# Altium PCB PCB.PcbDoc (part 1 of 2)
Units mm, origin at the board's own origin, x right, y up, seen from the top; angles counter-clockwise.
Board outline 135 x 105 mm, 2 copper layers (Top Layer, Bottom Layer); 93 components, 49 nets, 259 pads, 11 vias.
Unrouted connection lines stored in the file: 35.
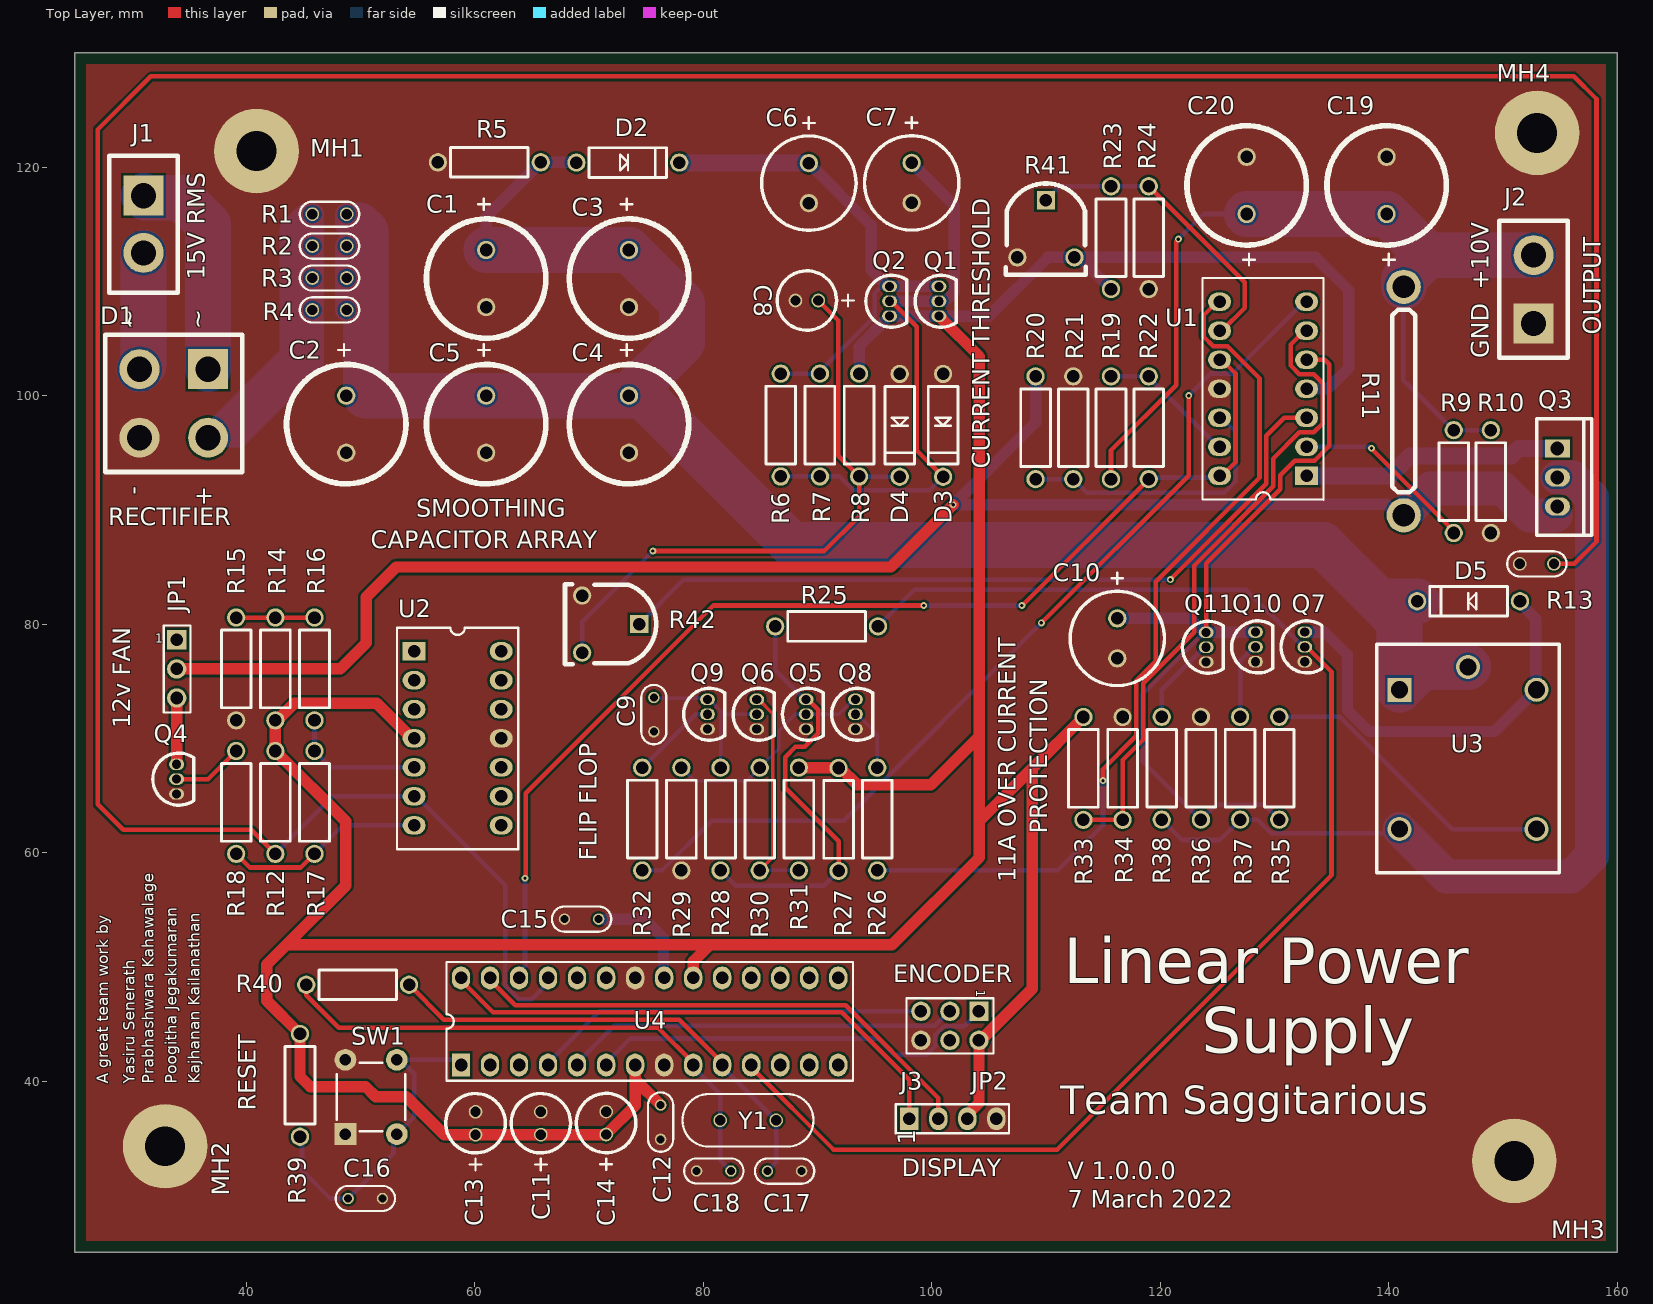
[diagram p0: Top Layer view]
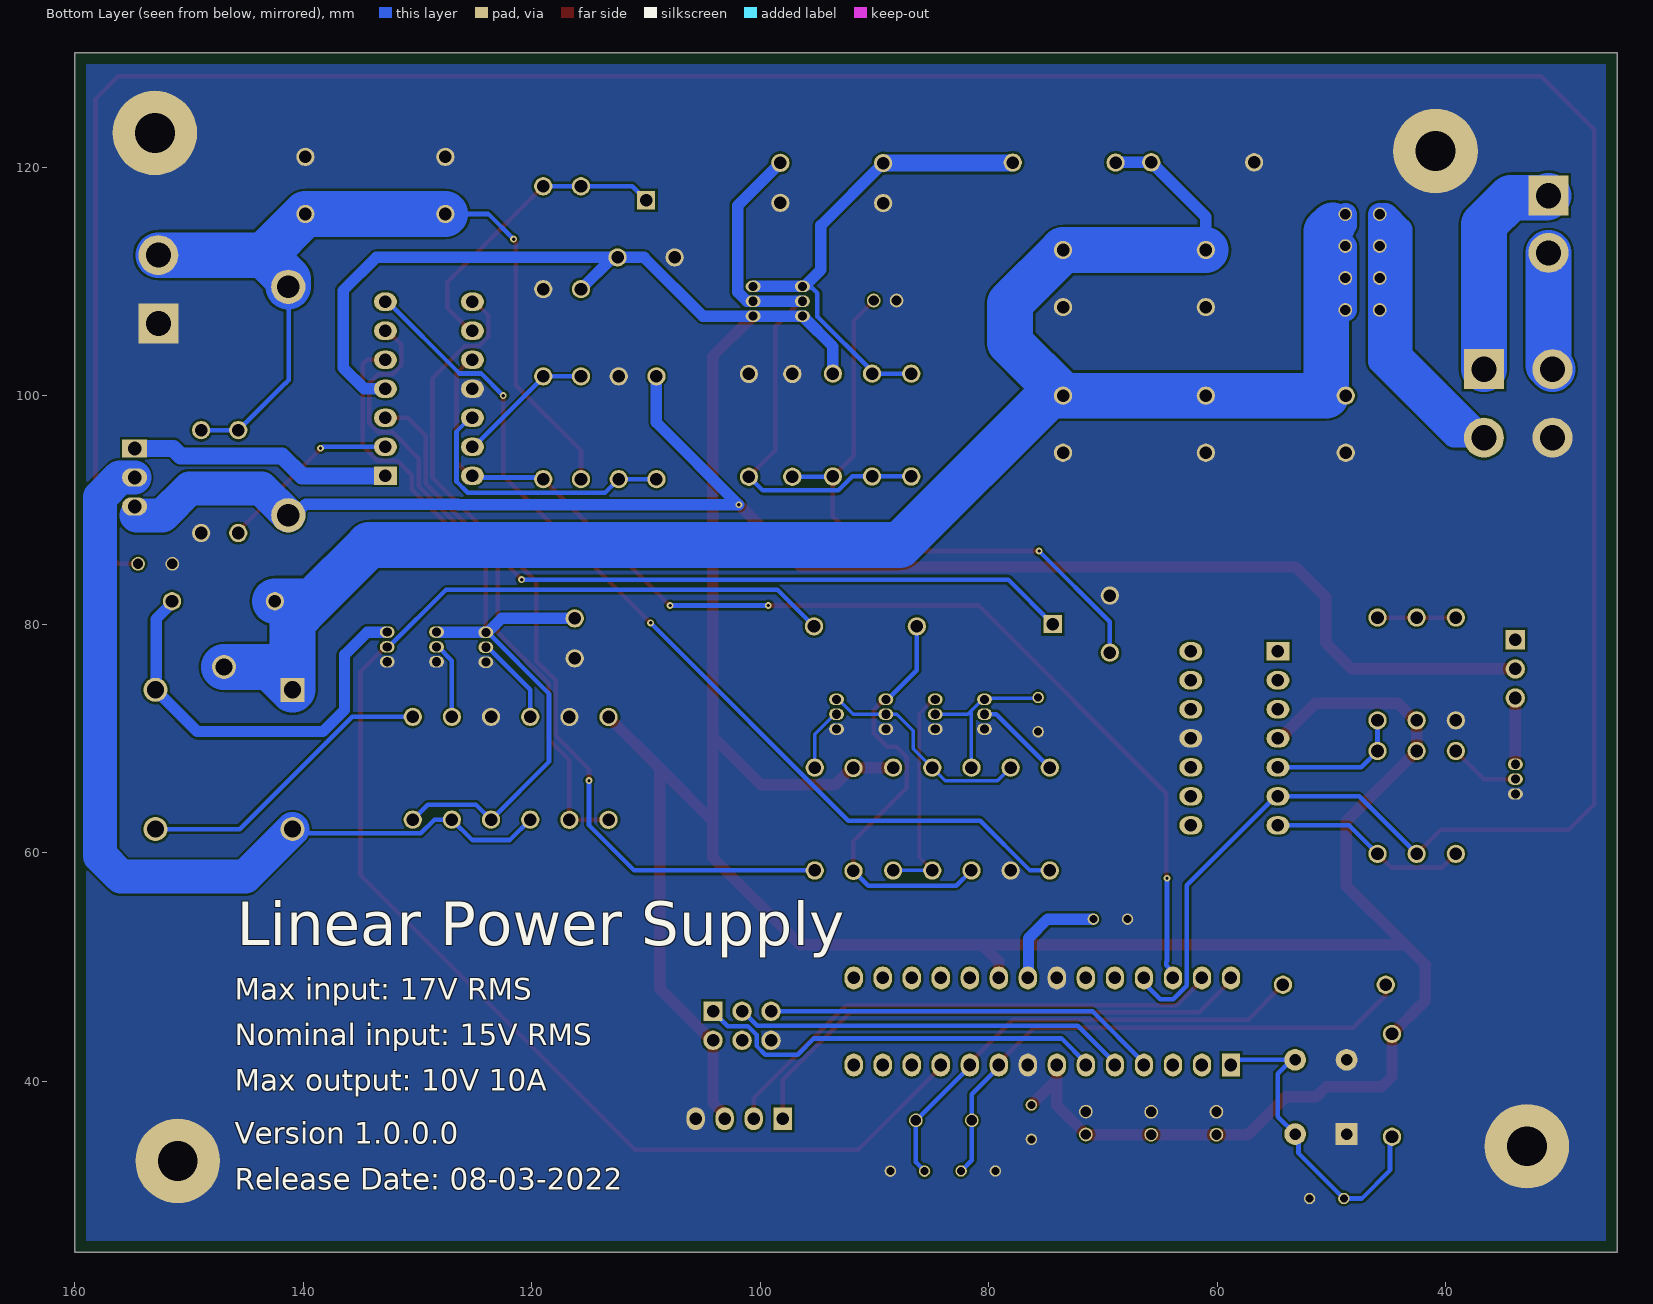
[diagram p1: Bottom Layer view, seen from below]
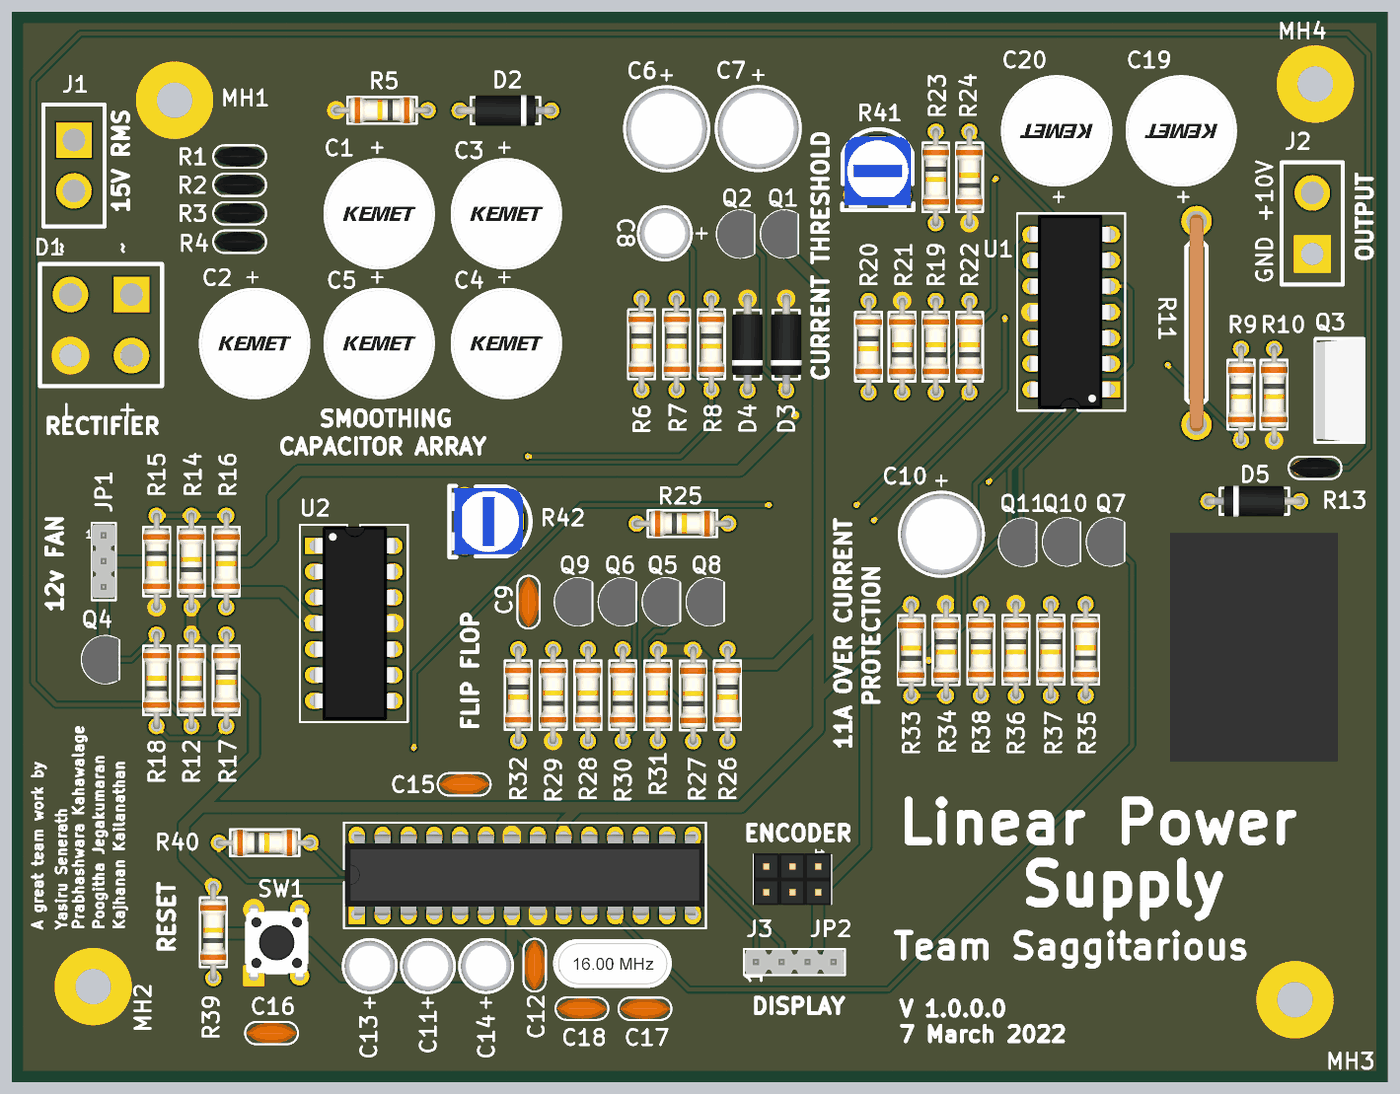
[diagram p2: 3D render of the assembled board from above, using the file's embedded part models]

## Layer stack, top to bottom
Top Solder: solder mask 0.0102, Solder Resist, Dk 3.5
Top Layer: signal copper 0.0356
Dielectric 1: dielectric 0.32, FR-4, Dk 4.8
Bottom Layer: signal copper 0.0356
Bottom Solder: solder mask 0.0102, Solder Resist, Dk 3.5

## Board outline
25,25 25,130 160,130 160,25

## Design rules (kind name [scope] priority, off if disabled: settings)
Clearance [All] p1: gap=0.2 ignorepadtopadclearanceinfootprint=FALSE
ComponentClearance [All] p1: gap=0.2 collisioncheckmode=3 verticalgap=0.2 showdistances=FALSE
HoleSize [All] p1: absolutevalues=TRUE maxlimit=10 minlimit=0.2 maxpercent=80.000 minpercent=20.000
HoleToHoleClearance [All] p1: gap=0.3 allowstackedmicrovias=TRUE
MinimumSolderMaskSliver [All] p1: minsoldermaskwidth=0.1
PolygonConnect [All] p1: connectstyle=Direct reliefconductorwidth=0.254 reliefentries=4 polygonreliefangle="90 Angle" airgapwidth=0.254
RoutingVias [All] p1: holewidth=0.3 width=0.6 viastyle="Through Hole" minholewidth=0.3 minwidth=0.6 maxholewidth=0.3 maxwidth=5
SilkToSilkClearance [All] p1: silktosilkclearance=0.1
SilkToSolderMaskClearance [IsPad] p1: minsilkscreentomaskgap=0.1 clearancetoexposedcopper=TRUE
SolderMaskExpansion [All] p1: expansion=0.1 istentingtop=FALSE
Width [All] p1: maxlimit=35.56 minlimit=0.3 preferedwidth=0.3
24 further rules are at their usual default settings.

## Components (designator, comment, footprint, x,y, rotation, side; value= is the part's Value field where it differs from the comment)
C1 "2200uF" CAP_3.5MM 61,110.25 r270 top
C2 "2200uF" CAP_3.5MM 48.75,97.5 r270 top
C3 "2200uF" CAP_3.5MM 73.5,110.25 r270 top
C4 "2200uF" CAP_3.5MM 73.5,97.5 r270 top
C5 "2200uF" CAP_3.5MM 61,97.5 r270 top
C6 "470uF" 47UF3.5MM 89.25,118.6 r270 top
C7 "470uF" 47UF3.5MM 98.25,118.625 r270 top
C8 "1uF" 1UF2MM 89.075,108.325 r180 top
C9 "100nF" 100NF3MM 75.676,72.077 r90 top
C10 "470uF" 47UF3.5MM 116.25,78.75 r270 top
C11 "10uF" 1UF2MM 65.786,36.306 r90 top
C12 "100nF" 100NF3MM 76.275,36.4 r90 top
C13 "10uF" 1UF2MM 60.071,36.306 r90 top
C14 "10uF" 1UF2MM 71.501,36.322 r90 top
C15 "100nF" 100NF3MM 69.35,54.175 r0 top
C16 "100nF" 100NF3MM 50.419,29.718 r180 top
C17 "18nF" 100NF3MM 87.121,32.114 r0 top
C18 "18nF" 100NF3MM 80.925,32.125 r180 top
C19 "2200uF" CAP_3.5MM 139.825,118.4 r90 top
C20 "2200uF" CAP_3.5MM 127.575,118.4 r90 top
D1 "KBPC3510-G" RECTIFIER 33.655,99.314 r270 top
D2 "1N4001" 1N4001 73.4,120.4 r180 top
D3 "17V" 1N4001 101,97.4 r90 top
D4 "12V" 1N4001 97.2,97.4 r90 top
D5 "1N4001" 1N4001 147,82 r0 top
J1 "POWERIN" TR_CONN 31,115 r0 top
J2 "POWEOUT" OUTPUT 152.7,109.3 r180 top
J3 "67997-106HLF" HDR_2X3_2.54MM 104.14,46.101 r270 top
JP1 "HEADER_FEMALE_1x3" HDR_1X3_2.54MM 33.909,78.613 r0 top
JP2 "HDR 1x4 2.54MM" MALEHEADER_1X4_2.54MM 98.044,36.703 r90 top
MH1 "Mounting_hole_17.4_3.2" MH_17.4_3.2 40.894,121.412 r0 top
MH2 "Mounting_hole_17.4_3.2" MH_17.4_3.2 32.893,34.29 r0 top
MH3 "Mounting_hole_17.4_3.2" MH_17.4_3.2 151,33 r0 top
MH4 "Mounting_hole_17.4_3.2" MH_17.4_3.2 153,123 r0 top
Q1 "2N3904" 2N3904 100.631,108.261 r0 top
Q2 "2N3904" 2N3904 96.313,108.261 r0 top
Q3 "IRFZ44NPBF" IRFZ44N 154.775,95.38 r0 top
Q4 "2N3904" 2N3904 33.9,66.425 r0 top
Q5 "2N3904" 2N3904 89.011,72.107 r0 top
Q6 "2N3904" 2N3904 84.693,72.107 r0 top
Q7 "2N3904" 2N3904 132.663,78.002 r0 top
Q8 "2N3904" 2N3904 93.329,72.107 r0 top
Q9 "2N3904" 2N3904 80.375,72.107 r0 top
Q10 "2N3904" 2N3904 128.345,78.002 r0 top
Q11 "2N3904" 2N3904 124.027,77.972 r0 top
R1 "10K" THERMISTOR 47.286,115.884 r0 top
R2 "10K" THERMISTOR 47.286,113.09 r0 top
R3 "10K" THERMISTOR 47.286,110.296 r0 top
R4 "10K" THERMISTOR 47.286,107.502 r0 top
R5 "10K" RES_0.25W 61.275,120.425 r180 top
R6 "10K" RES_0.25W 86.788,97.424 r270 top
R7 "10K" RES_0.25W 90.217,97.424 r270 top
R8 "680" RES_0.25W 93.646,97.424 r270 top
R9 "680" RES_0.25W 145.7,92.475 r270 top
R10 "10K" RES_0.25W 148.95,92.475 r270 top
R11 "Shunt" SHUNT 141.325,99.525 r270 top
R12 "10K" RES_0.25W 42.545,64.389 r90 top
R13 "10K" THERMISTOR 152.975,85.275 r0 top
R14 "10K" RES_0.25W 42.545,76.073 r90 top
R15 "10K" RES_0.25W 39.116,76.073 r270 top
R16 "10K" RES_0.25W 45.974,76.073 r270 top
R17 "10K" RES_0.25W 45.974,64.389 r270 top
R18 "10K" RES_0.25W 39.116,64.389 r90 top
R19 "1K" RES_0.25W 115.699,97.189 r90 top
R20 "1K" RES_0.25W 109.095,97.189 r270 top
R21 "100K" RES_0.25W 112.397,97.189 r90 top
R22 "100K" RES_0.25W 119.001,97.189 r90 top
R23 "20K" RES_0.25W 115.699,113.826 r270 top
R24 "13K" RES_0.25W 119.001,113.826 r90 top
R25 "10K" RES_0.25W 90.8,79.8 r0 top
R26 "10K" RES_0.25W 95.234,62.933 r270 top
R27 "5.1K" RES_0.25W 91.85,62.9 r90 top
R28 "15K" RES_0.25W 81.518,62.933 r90 top
R29 "150K" RES_0.25W 78.089,62.933 r90 top
R30 "10K" RES_0.25W 84.947,62.933 r90 top
R31 "10K" RES_0.25W 88.376,62.933 r90 top
R32 "10K" RES_0.25W 74.66,62.933 r270 top
R33 "10K" RES_0.25W 113.284,67.365 r90 top
R34 "36K" RES_0.25W 116.713,67.365 r270 top
R35 "10K" RES_0.25W 130.429,67.382 r90 top
R36 "100K" RES_0.25W 123.571,67.382 r270 top
R37 "8.2K" RES_0.25W 127,67.382 r270 top
R38 "8.2K" RES_0.25W 120.142,67.382 r270 top
R39 "10K" RES_0.25W 44.704,39.624 r90 top
R40 "10K" RES_0.25W 49.75,48.425 r0 top
R41 "10kTrim" TRIMPOT 110,114.6 r0 top
R42 "10kTrim" TRIMPOT 71.9,80 r270 top
SW1 "1825910-6" DIP41825910-6 50.927,38.608 r180 top
U1 "LM324NE4" DIP14 129.01,100.595 r180 top
U2 "LM324NE4" DIP14 58.5,70 r0 top
U3 "SRD-S-112D" RELAY_5PIN 146.95,76.25 r0 top
U4 "ATMEGA328P-PU" DIP28_7.62MM 58.801,41.402 r90 top
Y1 "ABM7-16.000MHZ-D2Y-T" OSCILATOR 83.933,36.559 r0 top

## Footprints (in the part's own frame and the unit in brackets; to place one, negate y for a bottom-side part, rotate by r counter-clockwise, add the part's x,y. Pads: shape width x height; smd on the part's side, far side on the other; paste and mask are expansions set on the pad)
1N4001 [mm]
  round 1.6 hole 1.1: 1(-4.5,0) 2(4.5,0)
  silkscreen extent -3.4,-1.3 3.4,1.3, body extent -4.9,-1.51 4.9,1.51, height 3.3
1UF2MM [mm]
  round 1.2 hole 0.9: 1(-1,0) 2(1,0)
  silkscreen extent -4.12,-2.6 2.6,2.6, body extent -2.5,-2.5 2.5,2.5, height 11
2N3904 [mm]
  oval 1.3x1 hole 0.8: 1(0,-1.3) 2(0,0) 3(0,1.3)
  silkscreen extent -2.08,-2.28 1.51,2.28, body extent -2.13,-2.38 1.5,2.38, height 5.32
47UF3.5MM [mm]
  round 1.6 hole 1.1: 1(-1.75,0) 2(1.75,0)
  silkscreen extent -5.77,-4.13 4.13,4.13, body extent -4,-4 4,4, height 12
100NF3MM [mm]
  round 1 hole 0.7: 1(-1.5,0) 2(1.5,0)
  silkscreen extent -2.6,-1.1 2.6,1.1, body extent -2.47,-1.01 2.47,1.01, height 5.66
CAP_3.5MM [mm]
  round 1.6 hole 1.1: 1(-2.5,0) 2(2.5,0)
  silkscreen extent -7.01,-5.22 5.22,5.23, body extent -5.25,-5.23 5.25,5.28, height 13.71
DIP14 [mm]
  rect 2x1.6 hole 1.1: 1(-3.81,7.62)
  oval 2x1.6 hole 1.1: 2(-3.81,5.08) 3(-3.81,2.54) 4(-3.81,0) 5(-3.81,-2.54) 6(-3.81,-5.08) 7(-3.81,-7.62) 8(3.81,-7.62) 9(3.81,-5.08) 10(3.81,-2.54) 11(3.81,0) 12(3.81,2.54) 13(3.81,5.08) 14(3.81,7.62)
  silkscreen extent -5.3,-9.7 5.3,9.7, body extent -3.9,-9.52 4.1,9.53, height 4.01
DIP28_7.62MM [mm]
  rect 2x1.6 hole 1.1: 1(0,0)
  oval 2x1.6 hole 1.1: 2(0,-2.54) 3(0,-5.08) 4(0,-7.62) 5(0,-10.16) 6(0,-12.7) 7(0,-15.24) 8(0,-17.78) 9(0,-20.32) 10(0,-22.86) 11(0,-25.4) 12(0,-27.94) 13(0,-30.48) 14(0,-33.02) 15(7.62,-33.02) 16(7.62,-30.48) 17(7.62,-27.94) 18(7.62,-25.4) 19(7.62,-22.86) 20(7.62,-20.32) 21(7.62,-17.78) 22(7.62,-15.24) 23(7.62,-12.7) 24(7.62,-10.16) 25(7.62,-7.62) 26(7.62,-5.08) 27(7.62,-2.54) 28(7.62,0)
  silkscreen extent -1.39,-34.31 9.01,1.27, body extent -0.06,-34.21 7.81,1.19, height 5.2
DIP41825910-6 [mm]
  rect 1.9x1.9 hole 1: 1(2.25,3.25)
  round 1.9 hole 1: 2(2.25,-3.25) 3(-2.25,3.25) 4(-2.25,-3.25)
  silkscreen extent -3,-3 3,3, body extent -3,-3.9 3,3.9, height 5
HDR_1X3_2.54MM [mm]
  rect 1.7x1.7 hole 1.1: 1(0,0)
  round 1.7 hole 1.1: 2(0,-2.54) 3(0,-5.08)
  silkscreen extent -1.14,-6.35 1.2,1.27, body extent -1.2,-6.11 1.21,1.11, height 8.19
HDR_2X3_2.54MM [mm]
  rect 1.7x1.7 hole 1.1: 1(0,0)
  round 1.7 hole 1.1: 2(2.54,0) 3(0,-2.54) 4(2.54,-2.54) 5(0,-5.08) 6(2.54,-5.08)
  silkscreen extent -1.14,-6.35 3.68,1.27, body extent -1.27,-6.35 3.81,1.27, height 8.45
IRFZ44N [mm]
  rect 2.2x1.6 hole 1.2: 1(0,0)
  oval 2.2x1.6 hole 1.2: 2(0,-2.54) 3(0,-5.08)
  silkscreen extent -1.8,-7.6 3,2.6, body extent -1.8,-7.58 3,2.58, height 19.3
MALEHEADER_1X4_2.54MM [mm]
  rect 2x1.6 hole 1.1: 1(0,0)
  oval 2x1.6 hole 1.1: 2(0,-2.54) 3(0,-5.08) 4(0,-7.62)
  silkscreen extent -1.27,-8.72 1.27,1.2, body extent -1.21,-8.66 1.2,1.1, height 8.19
MH_17.4_3.2 [mm]
  round 7.4 hole 3.5: 1(0,0)
OSCILATOR [mm]
  round 1.2 hole 0.9: 1(-2.45,0) 2(2.45,0)
  silkscreen extent -5.75,-2.3 5.72,2.3, body extent -5.65,-2.35 5.7,2.3, height 3.6
OUTPUT [mm]
  round 3.5 hole 2.2: 1(0,-3)
  rect 3.5x3.5 hole 2.2: 2(0,3)
  silkscreen extent -3,-6 3,6
RECTIFIER [mm]
  round 3.5 hole 2.2: 1(3,-3) 2(-3,-3) 3(3,3)
  rect 3.5x3.5 hole 2.2: 4(-3,3)
  silkscreen extent -6,-6 6,6
RELAY_5PIN [mm]
  rect 2.1x2.1 hole 1.5: 1(-6,-2)
  round 2.1 hole 1.5: 2(6,-2) 3(6,-14.2) 4(-6,-14.2) 5(0,0)
  silkscreen extent -8,-18 8,2, body extent -8.23,-19.83 8.27,2.67, height 19
RES_0.25W [mm]
  round 1.6 hole 1.1: 1(-4.5,0) 2(4.5,0)
  silkscreen extent -3.4,-1.3 3.4,1.3, body extent -4.8,-1.3 4.8,1.3, height 3.3
SHUNT [mm]
  round 3 hole 2: 1(-10,0) 2(10,0)
  silkscreen extent -8,-1 8,1, body extent -10.7,-0.7 10.7,0.7, height 5.7
THERMISTOR [mm]
  round 1.2 hole 0.9: 1(-1.5,0) 2(1.5,0)
  silkscreen extent -2.6,-1.1 2.6,1.1, body extent -2.47,-1.01 2.47,1.01, height 5.66
TR_CONN [mm]
  round 3.5 hole 2.2: 1(0,-2.5)
  rect 3.5x3.5 hole 2.2: 2(0,2.5)
  silkscreen extent -3,-6 3,6
TRIMPOT [mm]
  rect 1.6x1.6 hole 1.1: 1(0,2.5)
  round 1.6 hole 1.1: 2(-2.5,-2.5) 3(2.5,-2.5)
  silkscreen extent -3.5,-4 3.5,3.97, body extent -3.25,-3.82 3.25,3.22, height 9

## Part data
C1 C2 C3 C4 C5 C19 C20: library part UHE1V471MHD6, "Cap Aluminum Lytic 470uF 35V 20% (12.5 X 15mm) Radial 5mm 1450mA 10000h 105 Bulk", Capacitance=470uF, Case/Package=Radial, Dielectric Material=Aluminium, ESR (Equivalent Series Resistance)=160mR, Leakage Current=164.5uA, Manufacturer=Nichicon, Max Operating Temperature=105°C, Min Operating Temperature=-40°C, Package Quantity=100, Ripple Current=1.45A, Supplier Part Number 1=493-1583-ND, Tolerance=20%, Voltage Rating=35V, Category="Aluminum Electrolytic Capacitors", ComponentLink1Description=https://datasheet.ciiva.com/98/e-he-98887.pdf?src-supplier=Digi-Key, ComponentLink1URL=https://datasheet.ciiva.com/98/e-he-98887.pdf?src-supplier=Digi-Key, ComponentLink2Description=https://datasheet.ciiva.com/11683/e-he-11683294.pdf?src-supplier=Avnet, ComponentLink2URL=https://datasheet.ciiva.com/11683/e-he-11683294.pdf?src-supplier=Avnet, Diameter=12.5mm, Dissipation Factor=0.12%, Height=15mm, Height - Seated (Max)=0.591inch, Impedance=49mR, Lead Diameter=0.8mm, Lead Free="Lead Free", Lead Pitch=5mm, Length=15mm, Life (Hours)=10000Hour, Manufacturer Part Number=UHE1V471MHD6, Mount="Through Hole", Packaging=Bulk, Pricing 1="1=0.93000, 10=0.68400, 50=0.54700, 100=0.46890, 500=0.37124, 1000=0.31262, 2500=0.29308, 5000=0.27354 (USD)", Radiation Hardening=No, RoHS=Yes, RoHS Compliant=Yes, Series=HE, Stock 1=6165, Supplier 1=Digi-Key, Termination=Radial, Voltage Rating (DC)=35V
C6 C7 C10: library part 47uF, "Cap Aluminum Lytic 470uF 25V 20% (12.5 X 15mm) Radial 5mm 1450mA 10000h 105 Bulk", Case/Package=Radial, Dielectric Material=Aluminium, ESR (Equivalent Series Resistance)=160mR, Leakage Current=164.5uA, Manufacturer=Nichicon, Manufacturer Part Number=UHE1V471MHD6, Max Operating Temperature=105°C, Min Operating Temperature=-40°C, Package Quantity=100, Ripple Current=1.45A, Supplier Part Number 1=493-1583-ND, Tolerance=20%, Voltage Rating=35V, Capacitance=470uF, Category="Aluminum Electrolytic Capacitors", ComponentLink1Description=https://datasheet.ciiva.com/98/e-he-98887.pdf?src-supplier=Digi-Key, ComponentLink1URL=https://datasheet.ciiva.com/98/e-he-98887.pdf?src-supplier=Digi-Key, ComponentLink2Description=https://datasheet.ciiva.com/11683/e-he-11683294.pdf?src-supplier=Avnet, ComponentLink2URL=https://datasheet.ciiva.com/11683/e-he-11683294.pdf?src-supplier=Avnet, Diameter=12.5mm, Dissipation Factor=0.12%, Height=15mm, Height - Seated (Max)=0.591inch, Impedance=49mR, Lead Diameter=0.8mm, Lead Free="Lead Free", Lead Pitch=5mm, Length=15mm, Life (Hours)=10000Hour, Mount="Through Hole", Packaging=Bulk, Pricing 1="1=0.93000, 10=0.68400, 50=0.54700, 100=0.46890, 500=0.37124, 1000=0.31262, 2500=0.29308, 5000=0.27354 (USD)", Radiation Hardening=No, RoHS=Yes, RoHS Compliant=Yes, Series=HE, Stock 1=6165, Supplier 1=Digi-Key, Termination=Radial, Voltage Rating (DC)=35V
C8 C9 C12 C15 C16: "Cap Aluminum Lytic 1uF 100V 20% (12.5 X 15mm) Radial 5mm 1450mA 10000h 105 Bulk", Capacitance=470uF, Case/Package=Radial, Dielectric Material=Aluminium, ESR (Equivalent Series Resistance)=160mR, Leakage Current=164.5uA, Manufacturer=Nichicon, Manufacturer Part Number=UHE1V471MHD6, Max Operating Temperature=105°C, Min Operating Temperature=-40°C, Package Quantity=100, Ripple Current=1.45A, Supplier Part Number 1=493-1583-ND, Tolerance=20%, Voltage Rating=35V, Category="Aluminum Electrolytic Capacitors", ComponentLink1Description=https://datasheet.ciiva.com/98/e-he-98887.pdf?src-supplier=Digi-Key, ComponentLink1URL=https://datasheet.ciiva.com/98/e-he-98887.pdf?src-supplier=Digi-Key, ComponentLink2Description=https://datasheet.ciiva.com/11683/e-he-11683294.pdf?src-supplier=Avnet, ComponentLink2URL=https://datasheet.ciiva.com/11683/e-he-11683294.pdf?src-supplier=Avnet, Diameter=12.5mm, Dissipation Factor=0.12%, Height=15mm, Height - Seated (Max)=0.591inch, Impedance=49mR, Lead Diameter=0.8mm, Lead Free="Lead Free", Lead Pitch=5mm, Length=15mm, Life (Hours)=10000Hour, Mount="Through Hole", Packaging=Bulk, Pricing 1="1=0.93000, 10=0.68400, 50=0.54700, 100=0.46890, 500=0.37124, 1000=0.31262, 2500=0.29308, 5000=0.27354 (USD)", Radiation Hardening=No, RoHS=Yes, RoHS Compliant=Yes, Series=HE, Stock 1=6165, Supplier 1=Digi-Key, Termination=Radial, Voltage Rating (DC)=35V
C11 C13 C14: library part 1uF, "Cap Aluminum Lytic 1uF 100V 20% (12.5 X 15mm) Radial 5mm 1450mA 10000h 105 Bulk", Capacitance=470uF, Case/Package=Radial, Dielectric Material=Aluminium, ESR (Equivalent Series Resistance)=160mR, Leakage Current=164.5uA, Manufacturer=Nichicon, Manufacturer Part Number=UHE1V471MHD6, Max Operating Temperature=105°C, Min Operating Temperature=-40°C, Package Quantity=100, Ripple Current=1.45A, Supplier Part Number 1=493-1583-ND, Tolerance=20%, Voltage Rating=35V, Category="Aluminum Electrolytic Capacitors", ComponentLink1Description=https://datasheet.ciiva.com/98/e-he-98887.pdf?src-supplier=Digi-Key, ComponentLink1URL=https://datasheet.ciiva.com/98/e-he-98887.pdf?src-supplier=Digi-Key, ComponentLink2Description=https://datasheet.ciiva.com/11683/e-he-11683294.pdf?src-supplier=Avnet, ComponentLink2URL=https://datasheet.ciiva.com/11683/e-he-11683294.pdf?src-supplier=Avnet, Diameter=12.5mm, Dissipation Factor=0.12%, Height=15mm, Height - Seated (Max)=0.591inch, Impedance=49mR, Lead Diameter=0.8mm, Lead Free="Lead Free", Lead Pitch=5mm, Length=15mm, Life (Hours)=10000Hour, Mount="Through Hole", Packaging=Bulk, Pricing 1="1=0.93000, 10=0.68400, 50=0.54700, 100=0.46890, 500=0.37124, 1000=0.31262, 2500=0.29308, 5000=0.27354 (USD)", Radiation Hardening=No, RoHS=Yes, RoHS Compliant=Yes, Series=HE, Stock 1=6165, Supplier 1=Digi-Key, Termination=Radial, Voltage Rating (DC)=35V
C17 C18: library part 100nF, "Cap Aluminum Lytic 1uF 100V 20% (12.5 X 15mm) Radial 5mm 1450mA 10000h 105 Bulk", Capacitance=470uF, Case/Package=Radial, Dielectric Material=Aluminium, ESR (Equivalent Series Resistance)=160mR, Leakage Current=164.5uA, Manufacturer=Nichicon, Manufacturer Part Number=UHE1V471MHD6, Max Operating Temperature=105°C, Min Operating Temperature=-40°C, Package Quantity=100, Ripple Current=1.45A, Supplier Part Number 1=493-1583-ND, Tolerance=20%, Voltage Rating=35V, Category="Aluminum Electrolytic Capacitors", ComponentLink1Description=https://datasheet.ciiva.com/98/e-he-98887.pdf?src-supplier=Digi-Key, ComponentLink1URL=https://datasheet.ciiva.com/98/e-he-98887.pdf?src-supplier=Digi-Key, ComponentLink2Description=https://datasheet.ciiva.com/11683/e-he-11683294.pdf?src-supplier=Avnet, ComponentLink2URL=https://datasheet.ciiva.com/11683/e-he-11683294.pdf?src-supplier=Avnet, Diameter=12.5mm, Dissipation Factor=0.12%, Height=15mm, Height - Seated (Max)=0.591inch, Impedance=49mR, Lead Diameter=0.8mm, Lead Free="Lead Free", Lead Pitch=5mm, Length=15mm, Life (Hours)=10000Hour, Mount="Through Hole", Packaging=Bulk, Pricing 1="1=0.93000, 10=0.68400, 50=0.54700, 100=0.46890, 500=0.37124, 1000=0.31262, 2500=0.29308, 5000=0.27354 (USD)", Radiation Hardening=No, RoHS=Yes, RoHS Compliant=Yes, Series=HE, Stock 1=6165, Supplier 1=Digi-Key, Termination=Radial, Voltage Rating (DC)=35V
D1: "Rectifier Bridge Diode Single 1KV 35A 4-Pin Case KBPC Box", Manufacturer=Comchip, Package Quantity=50, Supplier Part Number 1=641-1858-ND, Category=Uncategorized, ComponentLink1Description=https://datasheet.ciiva.com/886/kbpc10005-gthru225890-kbpc5010-gseriesreva-886897.pdf?src-supplier=Digi-Key, ComponentLink1URL=https://datasheet.ciiva.com/886/kbpc10005-gthru225890-kbpc5010-gseriesreva-886897.pdf?src-supplier=Digi-Key, Manufacturer Part Number=KBPC3510-G, Mount="Surface Mount", Packaging=Bulk, Pricing 1="1=10.58000, 10=9.55500, 50=9.11020, 100=7.91030, 250=7.55480, 450=6.88820, 950=5.99940 (USD)", RoHS=Yes, RoHS Compliant=Yes, Series=KBPC3510, Stock 1=792, Supplier 1=Digi-Key
D2 D5: "Rectifier Diode, 1 Element, 1A, 50V V(RRM), Silicon, DO-41", Average Rectified Current=1A, Capacitance=15pF, Forward Voltage=1.1V, Manufacturer="ON Semiconductor / Fairchild", Max Forward Surge Current (Ifsm)=30A, Max Operating Temperature=175°C, Max Repetitive Reverse Voltage (Vrrm)=50V, Max Reverse Current=5uA, Min Operating Temperature=-55°C, Package Quantity=1000, Power Dissipation=3W, Category="Rectifier Diodes", ComponentLink1Description=https://datasheet.ciiva.com/910/1n4001-910352.pdf?src-supplier=Avnet, ComponentLink1URL=https://datasheet.ciiva.com/910/1n4001-910352.pdf?src-supplier=Avnet, ComponentLink2Description=https://datasheet.ciiva.com/910/1n4001-910352.pdf?src-supplier=Digi-Key, ComponentLink2URL=https://datasheet.ciiva.com/910/1n4001-910352.pdf?src-supplier=Digi-Key, ComponentLink3Description=https://datasheet.ciiva.com/4452/1n4004-81693-4452416.pdf?src-supplier=Mouser, ComponentLink3URL=https://datasheet.ciiva.com/4452/1n4004-81693-4452416.pdf?src-supplier=Mouser, ComponentLink4Description=https://datasheet.ciiva.com/30479/0900766b810c07cd-30479188.pdf?src-supplier=RSComponents, ComponentLink4URL=https://datasheet.ciiva.com/30479/0900766b810c07cd-30479188.pdf?src-supplier=RSComponents, ComponentLink5Description=https://datasheet.ciiva.com/15208/getdatasheetpartid-148723-15208346.pdf?src-supplier=Verical, ComponentLink5URL=https://datasheet.ciiva.com/15208/getdatasheetpartid-148723-15208346.pdf?src-supplier=Verical, ComponentLink6Description=https://datasheet.ciiva.com/8084/1n4007-8084076.pdf?src-supplier=Avnet, ComponentLink6URL=https://datasheet.ciiva.com/8084/1n4007-8084076.pdf?src-supplier=Avnet, ComponentLink7Description=https://datasheet.ciiva.com/910/1n4001-910353.pdf?src-supplier=Digi-Key, ComponentLink7URL=https://datasheet.ciiva.com/910/1n4001-910353.pdf?src-supplier=Digi-Key, ComponentLink8Description=https://datasheet.ciiva.com/927/1n4001-d-927540.pdf?src-supplier=Digi-Key, ComponentLink8URL=https://datasheet.ciiva.com/927/1n4001-d-927540.pdf?src-supplier=Digi-Key, ComponentLink9Description=https://datasheet.ciiva.com/22651/1923868-22651932.pdf?src-supplier=Element14, ComponentLink9URL=https://datasheet.ciiva.com/22651/1923868-22651932.pdf?src-supplier=Element14, ComponentLink10Description=https://datasheet.ciiva.com/22685/1504060-22685765.pdf?src-supplier=Element14, ComponentLink10URL=https://datasheet.ciiva.com/22685/1504060-22685765.pdf?src-supplier=Element14, Contact Plating=Tin,Matte, Current Rating=1A, Diameter=2.72mm, Element Configuration=Single, Forward Current=1A, Height=5.2mm, Lead Free="Lead Free", Length=5.2mm, Manufacturer Part Number=1N4001, Max Reverse Voltage (DC)=50V, Max Surge Current=30A, Mount="Through Hole", Number of Pins=2, Output Current=1A, Packaging="Tape and Reel", Peak Non-Repetitive Surge Current=30A, Polarity=Standard, Pricing 1="32052=0.01000 (USD)", Radiation Hardening=No, REACH SVHC="No SVHC", Reverse Voltage=50V, RoHS=Yes, RoHS Compliant=Yes, Stock 1=326522, Supplier 1=Avnet, Supplier Part Number 1=1N4001, Voltage Rating (DC)=50V, Weight=0.245g, Width=0.25inch
D3 D4: library part 17v_zener, "Zener Diode, 1 Element, 1A, 50V V(RRM), Silicon, DO-41", Average Rectified Current=1A, Capacitance=15pF, Forward Voltage=1.1V, Manufacturer="ON Semiconductor / Fairchild", Manufacturer Part Number=1N4001, Max Forward Surge Current (Ifsm)=30A, Max Operating Temperature=175°C, Max Repetitive Reverse Voltage (Vrrm)=50V, Max Reverse Current=5uA, Min Operating Temperature=-55°C, Package Quantity=1000, Power Dissipation=3W, Category="Rectifier Diodes", ComponentLink1Description=https://datasheet.ciiva.com/910/1n4001-910352.pdf?src-supplier=Avnet, ComponentLink1URL=https://datasheet.ciiva.com/910/1n4001-910352.pdf?src-supplier=Avnet, ComponentLink2Description=https://datasheet.ciiva.com/910/1n4001-910352.pdf?src-supplier=Digi-Key, ComponentLink2URL=https://datasheet.ciiva.com/910/1n4001-910352.pdf?src-supplier=Digi-Key, ComponentLink3Description=https://datasheet.ciiva.com/4452/1n4004-81693-4452416.pdf?src-supplier=Mouser, ComponentLink3URL=https://datasheet.ciiva.com/4452/1n4004-81693-4452416.pdf?src-supplier=Mouser, ComponentLink4Description=https://datasheet.ciiva.com/30479/0900766b810c07cd-30479188.pdf?src-supplier=RSComponents, ComponentLink4URL=https://datasheet.ciiva.com/30479/0900766b810c07cd-30479188.pdf?src-supplier=RSComponents, ComponentLink5Description=https://datasheet.ciiva.com/15208/getdatasheetpartid-148723-15208346.pdf?src-supplier=Verical, ComponentLink5URL=https://datasheet.ciiva.com/15208/getdatasheetpartid-148723-15208346.pdf?src-supplier=Verical, ComponentLink6Description=https://datasheet.ciiva.com/8084/1n4007-8084076.pdf?src-supplier=Avnet, ComponentLink6URL=https://datasheet.ciiva.com/8084/1n4007-8084076.pdf?src-supplier=Avnet, ComponentLink7Description=https://datasheet.ciiva.com/910/1n4001-910353.pdf?src-supplier=Digi-Key, ComponentLink7URL=https://datasheet.ciiva.com/910/1n4001-910353.pdf?src-supplier=Digi-Key, ComponentLink8Description=https://datasheet.ciiva.com/927/1n4001-d-927540.pdf?src-supplier=Digi-Key, ComponentLink8URL=https://datasheet.ciiva.com/927/1n4001-d-927540.pdf?src-supplier=Digi-Key, ComponentLink9Description=https://datasheet.ciiva.com/22651/1923868-22651932.pdf?src-supplier=Element14, ComponentLink9URL=https://datasheet.ciiva.com/22651/1923868-22651932.pdf?src-supplier=Element14, ComponentLink10Description=https://datasheet.ciiva.com/22685/1504060-22685765.pdf?src-supplier=Element14, ComponentLink10URL=https://datasheet.ciiva.com/22685/1504060-22685765.pdf?src-supplier=Element14, Contact Plating=Tin,Matte, Current Rating=1A, Diameter=2.72mm, Element Configuration=Single, Forward Current=1A, Height=5.2mm, Lead Free="Lead Free", Length=5.2mm, Max Reverse Voltage (DC)=50V, Max Surge Current=30A, Mount="Through Hole", Number of Pins=2, Output Current=1A, Packaging="Tape and Reel", Peak Non-Repetitive Surge Current=30A, Polarity=Standard, Pricing 1="32052=0.01000 (USD)", Radiation Hardening=No, REACH SVHC="No SVHC", Reverse Voltage=50V, RoHS=Yes, RoHS Compliant=Yes, Stock 1=326522, Supplier 1=Avnet, Supplier Part Number 1=1N4001, Voltage Rating (DC)=50V, Weight=0.245g, Width=0.25inch
J1: library part TransformerConn, "Connector for transformer", Manufacturer=Comchip, Manufacturer Part Number=KBPC3510-G, Package Quantity=50, Supplier Part Number 1=641-1858-ND, Category=Uncategorized, ComponentLink1Description=https://datasheet.ciiva.com/886/kbpc10005-gthru225890-kbpc5010-gseriesreva-886897.pdf?src-supplier=Digi-Key, ComponentLink1URL=https://datasheet.ciiva.com/886/kbpc10005-gthru225890-kbpc5010-gseriesreva-886897.pdf?src-supplier=Digi-Key, Mount="Surface Mount", Packaging=Bulk, Pricing 1="1=10.58000, 10=9.55500, 50=9.11020, 100=7.91030, 250=7.55480, 450=6.88820, 950=5.99940 (USD)", RoHS=Yes, RoHS Compliant=Yes, Series=KBPC3510, Stock 1=792, Supplier 1=Digi-Key
J2: library part OUTPUT, "Connector for PowrOut", Manufacturer=Comchip, Manufacturer Part Number=KBPC3510-G, Package Quantity=50, Supplier Part Number 1=641-1858-ND, Category=Uncategorized, ComponentLink1Description=https://datasheet.ciiva.com/886/kbpc10005-gthru225890-kbpc5010-gseriesreva-886897.pdf?src-supplier=Digi-Key, ComponentLink1URL=https://datasheet.ciiva.com/886/kbpc10005-gthru225890-kbpc5010-gseriesreva-886897.pdf?src-supplier=Digi-Key, Mount="Surface Mount", Packaging=Bulk, Pricing 1="1=10.58000, 10=9.55500, 50=9.11020, 100=7.91030, 250=7.55480, 450=6.88820, 950=5.99940 (USD)", RoHS=Yes, RoHS Compliant=Yes, Series=KBPC3510, Stock 1=792, Supplier 1=Digi-Key
J3: "Conn Unshrouded Header HDR 6 POS 2.54mm Solder ST Top Entry Thru-Hole BergStik® Bulk", Manufacturer=ICC, Supplier Part Number 1=06M1758, Category="Headers and Wire Housings", ComponentLink1Description=http://www.farnell.com/datasheets/1876884.pdf?src-supplier=Newark, ComponentLink1URL=http://www.farnell.com/datasheets/1876884.pdf?src-supplier=Newark, Manufacturer Part Number=67997-106HLF, Pricing 1="1=2.27000, 10=1.89000, 25=1.86000, 50=1.84000, 100=1.82000, 200=0.69900, 250=1.65000, 500=1.53000, 1000=1.33000, 2000=0.69900, 5000=0.69900 (USD)", RoHS=No, Stock 1=9, Supplier 1=Newark
JP1: library part 68000-103HLF, "Conn Unshrouded Header HDR 3 POS 2.54mm Solder ST Top Entry Thru-Hole BergStik® Automotive Bulk", Manufacturer="Amphenol ICC", Supplier Part Number 1=70236888, Category="Headers and Wire Housings", ComponentLink1Description=http://www.farnell.com/cad/1914865.pdf?src-supplier=Farnell, ComponentLink1URL=http://www.farnell.com/cad/1914865.pdf?src-supplier=Farnell, ComponentLink2Description=http://www.farnell.com/cad/1914865.pdf?src-supplier=Element14, ComponentLink2URL=http://www.farnell.com/cad/1914865.pdf?src-supplier=Element14, ComponentLink3Description=http://www.farnell.com/cad/1914865.pdf?src-supplier=Newark, ComponentLink3URL=http://www.farnell.com/cad/1914865.pdf?src-supplier=Newark, ComponentLink4Description=https://cdn.amphenol-icc.com/media/wysiwyg/files/drawing/68000.pdf?src-supplier=Digi-Key, ComponentLink4URL=https://cdn.amphenol-icc.com/media/wysiwyg/files/drawing/68000.pdf?src-supplier=Digi-Key, Manufacturer Part Number=68000-103HLF, RoHS=Yes, RoHS Compliant=Yes, Supplier 1="Allied Electronics"
JP2: library part 68001-204HLF, "Conn Unshrouded Header HDR 4 POS 2.54mm Solder ST Thru-Hole Bag", Manufacturer="Amphenol ICC / FCI", Supplier Part Number 1=70302499, Category="Headers and Wire Housings", Manufacturer Part Number=68001-204HLF, RoHS=No, Supplier 1="Allied Electronics"
MH1 MH2 MH3 MH4: "Mounting Hole plated"
Q1 Q2 Q4 Q5 Q6 Q7 Q8 Q9 Q10 Q11: "Bipolar Transistor, TO-92, 40V, 200mA, NPN", Case/Package=TO-92-3, Collector Base Voltage (VCBO)=60V, Collector Emitter Breakdown Voltage=40V, Collector Emitter Saturation Voltage=300mV, Emitter Base Voltage (VEBO)=6V, Manufacturer="ON Semiconductor / Fairchild", Max Collector Current=200mA, Max Operating Temperature=150°C, Max Power Dissipation=625mW, Min Operating Temperature=-55°C, Package Quantity=5000, Supplier Part Number 1=2N3904-296260-ON, Category=BJTs, Collector Emitter Voltage (VCEO)=40V, Collector-emitter Voltage-Max=40V, ComponentLink1Description=https://datasheet.ciiva.com/4725/2n3903-d-285841-4725808.pdf?src-supplier=Mouser, ComponentLink1URL=https://datasheet.ciiva.com/4725/2n3903-d-285841-4725808.pdf?src-supplier=Mouser, ComponentLink2Description=https://datasheet.ciiva.com/29323/163350-da-01-en-transistor-2n-3904-to92-fsc-29323035.pdf?src-supplier=Conrad, ComponentLink2URL=https://datasheet.ciiva.com/29323/163350-da-01-en-transistor-2n-3904-to92-fsc-29323035.pdf?src-supplier=Conrad, Element Configuration=Single, Gain Bandwidth Product=300MHz, hFE Min=100, Manufacturer Part Number=2N3904, Number of Pins=3, Packaging=Bulk, Polarity=NPN, Power Dissipation=625mW, REACH SVHC="No SVHC", RoHS=No, RoHS Compliant=Yes, Series=2N3904, Stock 1=1216, Supplier 1="Bison Technologies"
Q3: "MOSFET, Power; N-Ch; VDSS 55V; RDS(ON) 17.5 Milliohms; ID 49A; TO-220AB; PD 94W; -55deg", Case/Package=TO-220AB, Continuous Drain Current (ID)=49A, Drain to Source Breakdown Voltage=55V, Drain to Source Resistance=17.5mR, Gate to Source Voltage (Vgs)=20V, Input Capacitance=1.47nF, Manufacturer="International Rectifier", Max Operating Temperature=175°C, Max Power Dissipation=94W, Min Operating Temperature=-55°C, On-State Resistance=17.5MR, Package Quantity=50, Supplier Part Number 1=38AH8483, Threshold Voltage=2.1V, Category=MOSFETs, ComponentLink1Description=https://datasheet.ciiva.com/939/irfz44npbf-939122.pdf?src-supplier=Digi-Key, ComponentLink1URL=https://datasheet.ciiva.com/939/irfz44npbf-939122.pdf?src-supplier=Digi-Key, ComponentLink2Description=https://datasheet.ciiva.com/29326/162747-da-01-en-irfz-44-n-29326623.pdf?src-supplier=Conrad, ComponentLink2URL=https://datasheet.ciiva.com/29326/162747-da-01-en-irfz-44-n-29326623.pdf?src-supplier=Conrad, ComponentLink3Description=https://datasheet.ciiva.com/26791/irfz44npbf-26791355.pdf?src-supplier=IIIC, ComponentLink3URL=https://datasheet.ciiva.com/26791/irfz44npbf-26791355.pdf?src-supplier=IIIC, ComponentLink4Description=https://datasheet.ciiva.com/8079/irfz44n-8079627.pdf?src-supplier=Element14, ComponentLink4URL=https://datasheet.ciiva.com/8079/irfz44n-8079627.pdf?src-supplier=Element14, ComponentLink5Description=https://datasheet.ciiva.com/7835/irfz44npbf-7835740.pdf?src-supplier=Element14, ComponentLink5URL=https://datasheet.ciiva.com/7835/irfz44npbf-7835740.pdf?src-supplier=Element14, ComponentLink6Description=https://datasheet.ciiva.com/16199/irfz44npbf-16199655.pdf?src-supplier=Future+Electronics, ComponentLink6URL=https://datasheet.ciiva.com/16199/irfz44npbf-16199655.pdf?src-supplier=Future+Electronics, Current Rating=49A, Drain to Source Voltage (Vdss)=55V, Dual Supply Voltage=55V, Element Configuration=Single, Fall Time=45ns, Height=8.77mm, Lead Free="Lead Free", Lead Pitch=2.54mm, Length=10.67mm, Manufacturer Part Number=IRFZ44NPBF, Mount="Through Hole", Nominal Vgs=2.1V, Number of Elements=1, Number of Pins=3, Packaging=Rail/Tube, Power Dissipation=94W, Radiation Hardening=No, Rds On Max=17.5mR, REACH SVHC="No SVHC", Recovery Time=95ns, Rise Time=60ns, RoHS=Yes, RoHS Compliant=Yes, Supplier 1=Newark, Termination="Through Hole", Turn-Off Delay Time=44ns, Turn-On Delay Time=12ns, Voltage Rating (DC)=55V, Width=4.83mm
R1 R2 R3 R4 R13: library part Thermister_10K, "Thermistor", Case/Package=Axial, Manufacturer=Yageo, Manufacturer Part Number=MFR-25FBF52-1K, Max Operating Temperature=155°C, Max Power Dissipation=250mW, Min Operating Temperature=-55°C, Package Quantity=200, Resistance=1kR, Resistor Type="Metal Film", Supplier Part Number 1=1.00KXBK-ND, Temperature Coefficient=100ppm/°C, Tolerance=1%, Voltage Rating=250V, Voltage Rating (DC)=200V, Category="Through-Hole Resistors", ComponentLink1Description=https://datasheet.ciiva.com/25646/yageolr-mfr-2013-25646206.pdf?src-supplier=Digi-Key, ComponentLink1URL=https://datasheet.ciiva.com/25646/yageolr-mfr-2013-25646206.pdf?src-supplier=Digi-Key, Lead Diameter=0.6mm, Lead Free="Lead Free", Length=0.248inch, Mount="Through Hole", Number of Terminations=2, Packaging=Bulk, Power Rating=250mW, Pricing 1="1=0.10000, 10=0.08000, 25=0.05560, 50=0.04320, 100=0.03080, 250=0.02404, 500=0.01910, 1000=0.01355, 5000=0.01047 (USD)", RoHS=Yes, RoHS Compliant=Yes, Series=MFR, Stock 1=63048, Supplier 1=Digi-Key, Termination=Axial, Width=6.3mm
R5 R6 R7 R10 R12 R14 R15 R16 R17 R18 R23 R25 R26 R28 R30 R31 R32 R33 R35 R39 R40: library part MFR-25FRF52-10K, "Res Metal Film 10K Ohm 1% 1/4W ±100ppm/°C Conformal Axial Thru-Hole T/R", Case/Package=Axial, Manufacturer=Yageo, Max Operating Temperature=155°C, Max Power Dissipation=250mW, Min Operating Temperature=-55°C, Package Quantity=5000, Resistance=10kR, Resistor Type="Metal Film", Supplier Part Number 1=10.0KXTR-ND, Temperature Coefficient=100ppm/°C, Tolerance=1%, Voltage Rating=250V, Voltage Rating (DC)=200V, Category="Through-Hole Resistors", ComponentLink1Description=https://datasheet.ciiva.com/25645/yageolr-mfr-2013-25645549.pdf?src-supplier=Digi-Key, ComponentLink1URL=https://datasheet.ciiva.com/25645/yageolr-mfr-2013-25645549.pdf?src-supplier=Digi-Key, Lead Diameter=0.6mm, Lead Free="Lead Free", Length=0.248inch, Manufacturer Part Number=MFR-25FRF52-10K, Number of Terminations=2, Packaging="Tape and Reel", Power Rating=250mW, Pricing 1="5000=0.01047, 10000=0.00939, 25000=0.00862, 50000=0.00819 (USD)", RoHS=Yes, RoHS Compliant=Yes, Series=MFR, Stock 1=180000, Supplier 1=Digi-Key, Termination=Axial, Width=6.3mm
R8 R9: library part MFR-25FRF52-10K, "Res Metal Film 680Ohm 1% 1/4W ±100ppm/°C Conformal Axial Thru-Hole T/R", Case/Package=Axial, Manufacturer=Yageo, Max Operating Temperature=155°C, Max Power Dissipation=250mW, Min Operating Temperature=-55°C, Package Quantity=5000, Resistance=10kR, Resistor Type="Metal Film", Supplier Part Number 1=10.0KXTR-ND, Temperature Coefficient=100ppm/°C, Tolerance=1%, Voltage Rating=250V, Voltage Rating (DC)=200V, Category="Through-Hole Resistors", ComponentLink1Description=https://datasheet.ciiva.com/25645/yageolr-mfr-2013-25645549.pdf?src-supplier=Digi-Key, ComponentLink1URL=https://datasheet.ciiva.com/25645/yageolr-mfr-2013-25645549.pdf?src-supplier=Digi-Key, Lead Diameter=0.6mm, Lead Free="Lead Free", Length=0.248inch, Manufacturer Part Number=MFR-25FRF52-10K, Number of Terminations=2, Packaging="Tape and Reel", Power Rating=250mW, Pricing 1="5000=0.01047, 10000=0.00939, 25000=0.00862, 50000=0.00819 (USD)", RoHS=Yes, RoHS Compliant=Yes, Series=MFR, Stock 1=180000, Supplier 1=Digi-Key, Termination=Axial, Width=6.3mm
R11: Case/Package=Metal, Manufacturer=Yageo, Manufacturer Part Number=MFR-25FTE52-36K, Max Operating Temperature=155°C, Min Operating Temperature=-55°C, Power Rating=250mW, Resistance=36kR, Resistor Type="Metal Film", Supplier Part Number 1=13-MFR-25FTE52-36KCT-ND, Temperature Coefficient=50ppm/°C, Tolerance=1%, Voltage Rating=250V, Voltage Rating (DC)=200V, Category="Through-Hole Resistors", ComponentLink1Description=http://www.yageo.com/documents/recent/Leaded-R_MFR_2011.pdf?src-supplier=Mouser, ComponentLink1URL=http://www.yageo.com/documents/recent/Leaded-R_MFR_2011.pdf?src-supplier=Mouser, ComponentLink2Description=https://www.yageo.com/upload/media/product/products/datasheet/lr/Yageo_LR_MFR_1.pdf?src-supplier=Digi-Key, ComponentLink2URL=https://www.yageo.com/upload/media/product/products/datasheet/lr/Yageo_LR_MFR_1.pdf?src-supplier=Digi-Key, Lead Diameter=0.6mm, Length=2.4mm, Mount="Through Hole", Packaging="Ammo Pack", Pricing 1="1=0.10000, 10=0.08200, 25=0.05680, 50=0.04400, 100=0.03150, 250=0.02456, 500=0.01952, 1000=0.01386 (USD)", RoHS=Yes, Series=MFR, Stock 1=3420, Supplier 1=Digi-Key, Termination=Axial, Width=6.3mm
R19 R20 R37 R38: library part MFR-25FBF52-1K, "General Type Metal Film Resistor 1kOhm 1/4W 1% Axial Bulk", Case/Package=Axial, Manufacturer=Yageo, Max Operating Temperature=155°C, Max Power Dissipation=250mW, Min Operating Temperature=-55°C, Package Quantity=200, Resistance=1kR, Resistor Type="Metal Film", Supplier Part Number 1=1.00KXBK-ND, Temperature Coefficient=100ppm/°C, Tolerance=1%, Voltage Rating=250V, Voltage Rating (DC)=200V, Category="Through-Hole Resistors", ComponentLink1Description=https://datasheet.ciiva.com/25646/yageolr-mfr-2013-25646206.pdf?src-supplier=Digi-Key, ComponentLink1URL=https://datasheet.ciiva.com/25646/yageolr-mfr-2013-25646206.pdf?src-supplier=Digi-Key, Lead Diameter=0.6mm, Lead Free="Lead Free", Length=0.248inch, Manufacturer Part Number=MFR-25FBF52-1K, Mount="Through Hole", Number of Terminations=2, Packaging=Bulk, Power Rating=250mW, Pricing 1="1=0.10000, 10=0.08000, 25=0.05560, 50=0.04320, 100=0.03080, 250=0.02404, 500=0.01910, 1000=0.01355, 5000=0.01047 (USD)", RoHS=Yes, RoHS Compliant=Yes, Series=MFR, Stock 1=63048, Supplier 1=Digi-Key, Termination=Axial, Width=6.3mm
R21 R22 R24 R34: library part MFR-25FRF52-10K, "Res Metal Film 36K Ohm 1% 1/4W ±100ppm/°C Conformal Axial Thru-Hole T/R", Case/Package=Axial, Manufacturer=Yageo, Max Operating Temperature=155°C, Max Power Dissipation=250mW, Min Operating Temperature=-55°C, Package Quantity=5000, Resistance=10kR, Resistor Type="Metal Film", Supplier Part Number 1=10.0KXTR-ND, Temperature Coefficient=100ppm/°C, Tolerance=1%, Voltage Rating=250V, Voltage Rating (DC)=200V, Category="Through-Hole Resistors", ComponentLink1Description=https://datasheet.ciiva.com/25645/yageolr-mfr-2013-25645549.pdf?src-supplier=Digi-Key, ComponentLink1URL=https://datasheet.ciiva.com/25645/yageolr-mfr-2013-25645549.pdf?src-supplier=Digi-Key, Lead Diameter=0.6mm, Lead Free="Lead Free", Length=0.248inch, Manufacturer Part Number=MFR-25FRF52-10K, Number of Terminations=2, Packaging="Tape and Reel", Power Rating=250mW, Pricing 1="5000=0.01047, 10000=0.00939, 25000=0.00862, 50000=0.00819 (USD)", RoHS=Yes, RoHS Compliant=Yes, Series=MFR, Stock 1=180000, Supplier 1=Digi-Key, Termination=Axial, Width=6.3mm
R27: library part MFR-25FBF52-5K1, "General Type Metal Film Resistor 5.1kOhm 1/4W 1% Axial Bulk", Case/Package=Metal, Manufacturer=Yageo, Max Operating Temperature=155°C, Min Operating Temperature=-55°C, Power Rating=250mW, Resistance=5.1kR, Supplier Part Number 1=MFR-25FBF52-5K1-ND, Tolerance=1%, Voltage Rating=250V, Voltage Rating (DC)=200V, Category="Through-Hole Resistors", ComponentLink1Description=http://www.mouser.com/ds/2/447/Yageo%20LR_MFR_2013-467719.pdf?src-supplier=Mouser, ComponentLink1URL=http://www.mouser.com/ds/2/447/Yageo%20LR_MFR_2013-467719.pdf?src-supplier=Mouser, ComponentLink2Description=https://www.yageo.com/upload/media/product/products/datasheet/lr/Yageo_LR_MFR_1.pdf?src-supplier=Digi-Key, ComponentLink2URL=https://www.yageo.com/upload/media/product/products/datasheet/lr/Yageo_LR_MFR_1.pdf?src-supplier=Digi-Key, Manufacturer Part Number=MFR-25FBF52-5K1, Packaging=Bulk, Pricing 1="1=0.10000, 10=0.08000, 25=0.05560, 50=0.04320, 100=0.03080, 250=0.02404, 500=0.01910, 1000=0.01355, 5000=0.01047 (USD)", RoHS=Yes, Stock 1=4000, Supplier 1=Digi-Key, Termination=Axial
R29: library part MFR-25FBF52-150K, "General Type Metal Film Resistor 150kOhm 1/4W 1% Axial Bulk", Case/Package=Axial, Manufacturer=Yageo, Max Operating Temperature=155°C, Max Power Dissipation=250mW, Min Operating Temperature=-55°C, Package Quantity=200, Resistance=150kR, Resistor Type="Metal Film", Supplier Part Number 1=150KXBK-ND, Temperature Coefficient=100ppm/°C, Tolerance=1%, Voltage Rating=250V, Voltage Rating (DC)=200V, Category="Through-Hole Resistors", ComponentLink1Description=https://datasheet.ciiva.com/5505/yageolr-mfr-2013-467719-5505320.pdf?src-supplier=Mouser, ComponentLink1URL=https://datasheet.ciiva.com/5505/yageolr-mfr-2013-467719-5505320.pdf?src-supplier=Mouser, Lead Diameter=0.6mm, Length=0.248inch, Manufacturer Part Number=MFR-25FBF52-150K, Mount="Through Hole", Number of Terminations=2, Packaging=Bulk, Power Rating=250mW, Pricing 1="1=0.10000, 10=0.08000, 25=0.05560, 50=0.04320, 100=0.03080, 250=0.02404, 500=0.01910, 1000=0.01355, 5000=0.01047 (USD)", RoHS=Yes, Stock 1=13526, Supplier 1=Digi-Key, Termination=Axial, Width=6.3mm
R36: library part MFR-25FBF52-100K, "Res General Purpose Metal Film 100k Ohm 1% 1/4W ±100ppm/°C Conformal Axial Bulk", Case/Package=Axial, Manufacturer=Yageo, Max Operating Temperature=155°C, Max Power Dissipation=250mW, Min Operating Temperature=-55°C, Package Quantity=200, Resistance=100kR, Resistor Type="Metal Film", Supplier Part Number 1=100KXBK-ND, Temperature Coefficient=100ppm/°C, Tolerance=1%, Voltage Rating=250V, Voltage Rating (DC)=200V, Category="Through-Hole Resistors", ComponentLink1Description=https://datasheet.ciiva.com/25646/yageolr-mfr-2013-25646205.pdf?src-supplier=Digi-Key, ComponentLink1URL=https://datasheet.ciiva.com/25646/yageolr-mfr-2013-25646205.pdf?src-supplier=Digi-Key, Construction=Cylindrical, Length=0.248inch, Manufacturer Part Number=MFR-25FBF52-100K, Military Standard=Not, Mount="Through Hole", Number of Terminations=2, Packaging=Bulk, Power Rating=250mW, Pricing 1="1=0.10000, 10=0.08000, 25=0.05560, 50=0.04320, 100=0.03080, 250=0.02404, 500=0.01910, 1000=0.01355, 5000=0.01047 (USD)", RoHS=Yes, RoHS Compliant=Yes, Series=MFR, Stock 1=14092, Supplier 1=Digi-Key, Termination=Axial
R41 R42: library part trimpot, "Res Metal Foil Trimmer 10K Ohm 5% 1/4W 21Turn Pin Thru-Hole Foam Pack/Box", Case/Package=Metal, Manufacturer="VPG Foil Resistors", Manufacturer Part Number=Y405310K0000J0L, Max Operating Temperature=150°C, Max Power Dissipation=250mW, Min Operating Temperature=-55°C, Package Quantity=25, Resistance=10kR, Resistance Tolerance=5%, Resistor Type="Metal Foil", Temperature Coefficient=10ppm/°C, Voltage Rating=250V, Category="Through-Hole Resistors", ComponentLink1Description=https://datasheet.ciiva.com/25604/0900766b81142c85-25604224.pdf?src-supplier=RSComponents, ComponentLink1URL=https://datasheet.ciiva.com/25604/0900766b81142c85-25604224.pdf?src-supplier=RSComponents, ComponentLink2Description=https://datasheet.ciiva.com/2165/1240-2165920.pdf?src-supplier=Digi-Key, ComponentLink2URL=https://datasheet.ciiva.com/2165/1240-2165920.pdf?src-supplier=Digi-Key, ComponentLink3Description=https://datasheet.ciiva.com/8699/1240-8699514.pdf?src-supplier=Avnet, ComponentLink3URL=https://datasheet.ciiva.com/8699/1240-8699514.pdf?src-supplier=Avnet, ComponentLink4Description=https://datasheet.ciiva.com/17559/1240-17559583.pdf?src-supplier=Avnet+Europe, ComponentLink4URL=https://datasheet.ciiva.com/17559/1240-17559583.pdf?src-supplier=Avnet+Europe, Depth=4.45mm, Height=6.35mm, Length=6.35mm, Military Standard=Not, Mount="Through Hole,PCB", Number of Turns=21, Packaging=Bulk, Power Rating=250mW, Pricing 1="1=68.06000, 10=61.58100, 25=51.85760, 50=48.61640, 100=46.99580 (USD)", Radiation Hardening=No, REACH SVHC=Unknown, RoHS=Yes, RoHS Compliant=Yes, Series=1240, Stock 1=485, Supplier 1=Digi-Key, Taper=Linear, Technology="METAL FOIL", Termination=Pin, Tolerance=5%, Weight=0.01411oz, Width=4.45mm
SW1: "Switch Tactile OFF (ON) SPST Round Button PC Pins 0.05A 24VDC 1.57N Thru-Hole Loose", Actuator Color=Black, Contact Current Rating=50mA, Contact Resistance=100mR, Manufacturer="TE Connectivity Alcoswitch", Max Operating Temperature=85°C, Max Voltage Rating (DC)=24V, Min Operating Temperature=-35°C, Operating Force=160gf, Package Quantity=750, Supplier Part Number 1=450-1650-ND, Actuator Length=0.055inch, Actuator Material=PBT, Actuator Type=Standard, Category="Pushbutton Switches", ComponentLink1Description=https://datasheet.ciiva.com/30199/1825910-6rqpn1825910-6-30199520.pdf?src-supplier=Onlinecomponents.com, ComponentLink1URL=https://datasheet.ciiva.com/30199/1825910-6rqpn1825910-6-30199520.pdf?src-supplier=Onlinecomponents.com, ComponentLink2Description=https://datasheet.ciiva.com/15184/getdatasheetpartid-395915-15184509.pdf?src-supplier=Verical, ComponentLink2URL=https://datasheet.ciiva.com/15184/getdatasheetpartid-395915-15184509.pdf?src-supplier=Verical, Contact Material="Copper Alloy", Contact Plating=Silver, Electrical Life=100000Cycles, ELV=Compliant, Illumination Type=Non-Illuminated,Illuminated, Lead Free="Lead Free", Length=5.99mm, Manufacturer Part Number=1825910-6, Max Current Rating=50mA, Mechanical Life=100000Cycles, Mount="Through Hole", Orientation=Straight, Packaging="Loose Piece", Pricing 1="1=0.12000, 10=0.11300, 25=0.10720, 100=0.09750, 250=0.09164, 500=0.08382, 1000=0.07018, 2500=0.06823, 5000=0.06433 (USD)", REACH SVHC=Unknown, RoHS=Yes, RoHS Compliant=Yes, Series=FSMJ, Stock 1=147083, Supplier 1=Digi-Key, Switch Function=Off-Mom, Switch Travel=0.25mm, Termination="PC Pins", Throw Configuration=SPST, Type=Switch
U1 U2: "4-Channel industry standard operational amplifier 14-PDIP 0 to 70", Case/Package=PDIP, Dual Supply Voltage=3V, Input Bias Current=250nA, Input Offset Voltage (Vos)=7mV, Manufacturer="Texas Instruments", Max Dual Supply Voltage=16V, Max Operating Temperature=70°C, Max Supply Current=700uA, Max Supply Voltage=32V, Min Dual Supply Voltage=1.5V, Min Operating Temperature=0°C, Nominal Supply Current=3mA, Operating Supply Current=1.4mA, Output Current=30mA, Output Current per Channel=60mA, Package Quantity=25, Supplier Part Number 1=296-36105-5-ND, Voltage Gain=100dB, Amplifier Type="GENERAL PURPOSE", Bandwidth=1.2MHz, Category="Amplifiers - Op Amps, Buffer, Instrumentation", Common Mode Rejection Ratio=65dB, ComponentLink1Description=https://datasheet.ciiva.com/19477/826671-19477011.pdf?src-supplier=Jameco, ComponentLink1URL=https://datasheet.ciiva.com/19477/826671-19477011.pdf?src-supplier=Jameco, ComponentLink2Description=https://datasheet.ciiva.com/18622/lm224-18622488.pdf?src-supplier=Digi-Key, ComponentLink2URL=https://datasheet.ciiva.com/18622/lm224-18622488.pdf?src-supplier=Digi-Key, ComponentLink3Description=https://datasheet.ciiva.com/2973/lm324ka-2973359.pdf?src-supplier=Avnet, ComponentLink3URL=https://datasheet.ciiva.com/2973/lm324ka-2973359.pdf?src-supplier=Avnet, Gain Bandwidth Product=1.2MHz, Height=4.57mm, Lead Free="Lead Free", Length=19.3mm, Manufacturer Part Number=LM324NE4, Min Supply Voltage=3V, Mount="Through Hole", Number of Channels=4, Number of Circuits=4, Number of Elements=4, Number of Pins=14, Operating Supply Voltage=16V, Packaging=Rail/Tube, Pricing 1="1=0.70000, 10=0.61200, 25=0.57520, 100=0.46930, 250=0.43592, 500=0.37100, 1000=0.30625 (USD)", Radiation Hardening=No, RoHS=Yes, RoHS Compliant=Yes, Series=-, Slew Rate=0.5V/µs, Stock 1=2879, Supplier 1=Digi-Key, Supply Current=3mA, Technology=BIPOLAR, Unity Gain Bandwidth Product=1.2MHz, Width=6.35mm
U3: "General Purpose Relay SPDT (1 Form C) 12VDC Coil Through Hole"
U4: "ATMEGA328P-PU; 8 bit Microcontroller AVR 20MHz 1; 32kb Flash; 2kb RAM; I2C SPI 2", Case/Package=PDIP, Frequency=20MHz, Manufacturer="Microchip / Atmel", Max Operating Temperature=85°C, Max Supply Voltage=5.5V, Min Operating Temperature=-40°C, Min Supply Voltage=1.8V, Package Quantity=14, Supplier Part Number 1=70332157, Category=Microcontrollers, ComponentLink1Description=https://datasheet.ciiva.com/19457/2139111-19457070.pdf?src-supplier=Jameco, ComponentLink1URL=https://datasheet.ciiva.com/19457/2139111-19457070.pdf?src-supplier=Jameco, ComponentLink2Description=https://datasheet.ciiva.com/1157/1684409-1157696.pdf?src-supplier=Element14, ComponentLink2URL=https://datasheet.ciiva.com/1157/1684409-1157696.pdf?src-supplier=Element14, ComponentLink3Description=https://datasheet.ciiva.com/20168/73-4283-20168380.pdf?src-supplier=Rapid+Electronics, ComponentLink3URL=https://datasheet.ciiva.com/20168/73-4283-20168380.pdf?src-supplier=Rapid+Electronics, ComponentLink4Description=https://datasheet.ciiva.com/29119/155197-da-01-en-microcontr-atmega328p-pu-8bit-pdip-28-29119593.pdf?src-supplier=Conrad, ComponentLink4URL=https://datasheet.ciiva.com/29119/155197-da-01-en-microcontr-atmega328p-pu-8bit-pdip-28-29119593.pdf?src-supplier=Conrad, ComponentLink5Description=https://datasheet.ciiva.com/26818/atmega328p-pu-26818578.pdf?src-supplier=IIIC, ComponentLink5URL=https://datasheet.ciiva.com/26818/atmega328p-pu-26818578.pdf?src-supplier=IIIC, ComponentLink6Description=https://datasheet.ciiva.com/15213/getdatasheetpartid-318533-15213133.pdf?src-supplier=Verical, ComponentLink6URL=https://datasheet.ciiva.com/15213/getdatasheetpartid-318533-15213133.pdf?src-supplier=Verical, Contact Plating=Tin,Matte, Core Architecture=AVR, Data Bus Width=8b, Height=3.28mm, Interface=I2C,SPI,UART,USART,2-Wire, Lead Free="Lead Free", Length=37.4mm, Manufacturer Part Number=ATMEGA328P-PU, Max Frequency=20MHz, Memory Size=32KB, Memory Type=FLASH, Mount="Through Hole", Number of ADC Channels=6, Number of I2C Channels=1, Number of I/Os=23, Number of Pins=28, Number of Programmable I/O=23, Number of PWM Channels=6, Number of SPI Channels=1, Number of Timers/Counters=3, Oscillator Type=Internal, Packaging=Rail/Tube, Peripherals="Brown-out Detect/Reset,POR,PWM,WDT", Radiation Hardening=No, RAM Size=2KB, REACH SVHC="No SVHC", RoHS=Yes, RoHS Compliant=Yes, Series="AVR® ATmega", Supplier 1="Allied Electronics", Watchdog Timer=Yes, Width=6.76mm